# EAGLE board Tilt_Sensor_Board_v2 (EAGLE 9.7.0)
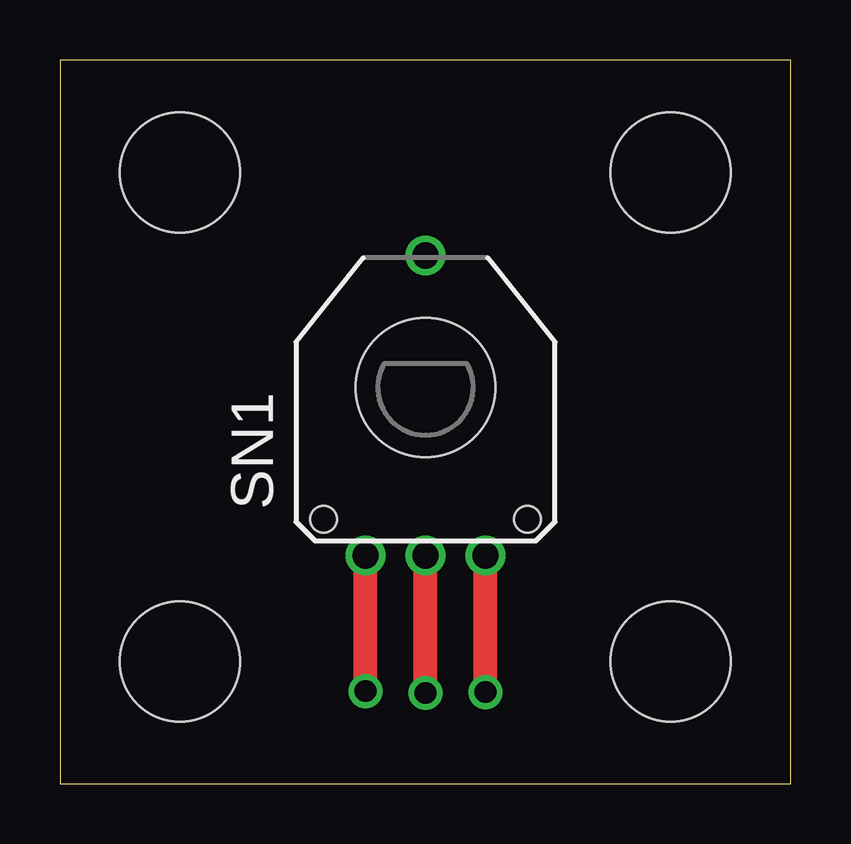
[diagram p0: board, top side]

Size 30.46 x 30.15 mm. Coordinates in mm from the lower left corner, seen from the top.
Outline: 0,0 30.46,0 30.46,30.15 0,30.15 0,0
Copper layers (1*16): Top 0.035mm / dielectric 1.5mm / Bottom 0.035mm
Design rules "Use_this": minimum track width 8mil, minimum drill 0.8mm, track to track 0.794003125mm, track to pad 0.794003125mm, pad to pad 0.794003125mm, via to via 0.794003125mm, smd to smd 0mil, copper to edge 0mil, drill to drill 1mil, minimum pad ring 10mil, minimum via ring 10mil, stop-mask expansion 1mil, vias tented up to drill 30mil, thermal gap 10mil
Holes 5 mm at 5,25.46 5,5.08 25.46,5.08 25.46,25.46

## Footprints (pad centres in the part's own frame; a part is rotated, then mirrored left to right if it is on the bottom)
SV01L = drill 1.1 pad 1.651: 1 -2.5,-7 | drill 1.1 pad 1.524: 2 0,-7; 3 2.5,-7; 4 0,5.5 | hole 5.8: 0,0 | hole 1.1: 4.25,-5.5; -4.25,-5.5

## Placement (x,y rotation side)
SN1  SV01L  [SV01L]  15.24,16.51 0 top

## Library data of the parts
SN1 = murata-sensor; OC_FARNELL: unknown; OC_NEWARK: unknown

## Nets
3V3: SN1.3
DIGITALPIN: SN1.2
GND: SN1.1

## Tracks (layer width: path | path; a pad name or v marks a point on that pad's centre or on a via)
3V3  (via drill 0.9)
  Top 1: v17.74,3.81 SN1.3
DIGITALPIN  (via drill 0.9)
  Top 1: v15.24,3.77 SN1.2
GND  (via drill 0.9)
  Top 1: v12.74,3.85 SN1.1